# Altium PCB arca.PcbDoc (part 2 of 2)
Units mm, origin at the board's own origin, x right, y up, seen from the top; angles counter-clockwise.
Board outline 304.8 x 85 mm, 2 copper layers (Top Layer, Bottom Layer); 193 components, 131 nets, 585 pads, 90 vias.
Unrouted connection lines stored in the file: 15.
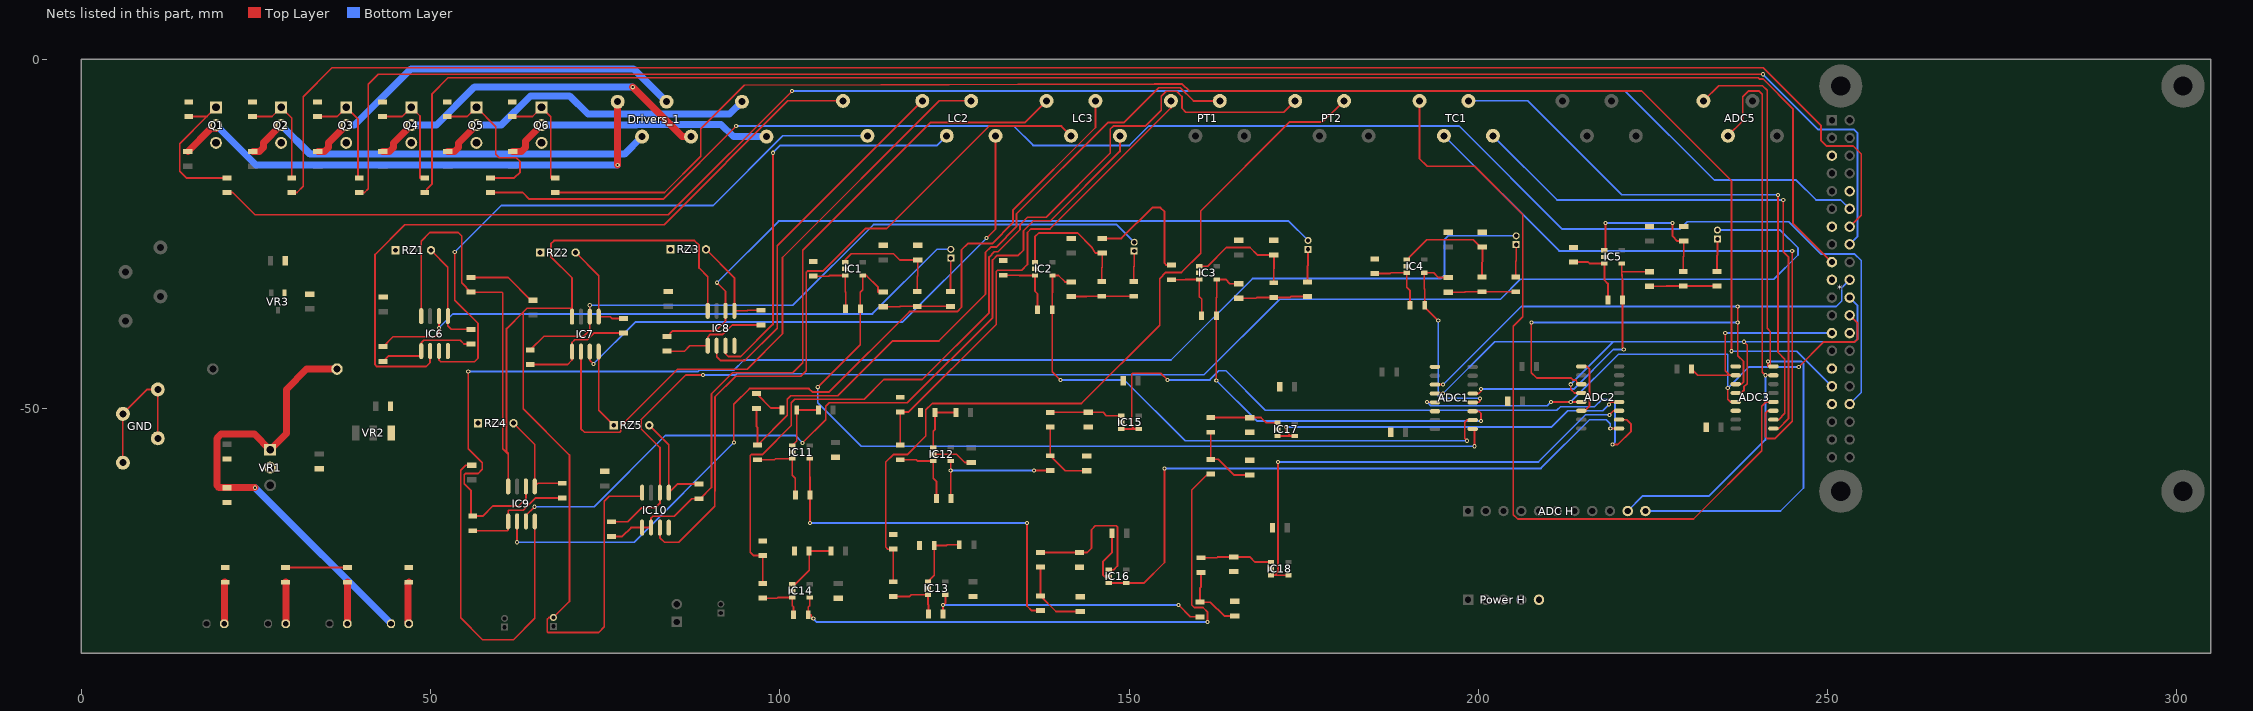
[diagram p2: the nets of this part, all layers, seen from the top]

## Via types
v1: diameter 0.6, hole 0.3, Top Layer to Bottom Layer, 90 vias

## Nets (pads, with @x,y where several pads share a name; then routed paths per layer and width w, separated by ;. In a path a pad name is that pad's centre, name@x,y a point inside that pad or via, vN(x,y) a via of type N, cw(c..) or ccw(c..) an arc to the next point about the centre after c; other vN are vias at no path point) (continued)
ADC3_A6: "ADC H.10" ADC3.7 ADC5.2 | length 84.5
  Top Layer w0.254: ADC5.2@235.712,-10.922 237.82,-8.814 237.82,-5.334 238.633,-4.521 240.182,-4.521 240.614,-4.953 240.614,-44.755 v1(241.071,-45.212) ADC3.7@242.222,-45.212
  Bottom Layer w0.254: 221.361,-64.643 223.52,-62.484 233.045,-62.484 241.071,-54.458 v1(241.071,-45.212)
ADC3_A7: "ADC H.11" ADC3.8 ADC5.1 | length 98.5
  Top Layer w0.254: ADC5.1@232.212,-5.922 234.375,-3.759 240.665,-3.759 241.325,-4.42 241.325,-38.481 241.783,-38.938 ADC3.8@241.783,-43.942 ; v1(241.452,-43.231) 241.452,-43.942 ADC3.8@241.783,-43.942 ; ADC3.8@242.222,-43.942 ADC3.8@241.783,-43.942
  Bottom Layer w0.254: 223.901,-64.643 243.23,-64.643 246.532,-61.341 246.532,-43.51 246.253,-43.231 v1(241.452,-43.231)
ADC3_CS: *.26 ADC3.10 R3.1 | length 28.3
  Top Layer w0.254: R3.1@230.514,-44.323 231.403,-45.212 235.966,-45.212 ; v1(235.331,-39.167) 235.331,-44.577 235.966,-45.212 ; ADC3.10@236.822,-45.212 235.966,-45.212
  Bottom Layer w0.254: v1(235.331,-39.167) *.26@250.596,-39.167
CAL: IC6.8 IC7.8 IC8.8 IC9.8 IC10.8 LC_EN/CAL1.2 RPD1.1 | length 213.4
  Top Layer w0.254: IC6.8@48.641,-36.743 48.641,-26.01 49.886,-24.765 53.924,-24.765 54.432,-25.273 54.432,-31.987 RPD1.1@55.753,-33.308 60.173,-33.308 60.3,-33.435 60.3,-55.753 61.087,-56.54 ; IC9.8@61.087,-61.127 61.087,-56.54 ; IC7.8@70.231,-36.823 70.231,-35.611 ; IC10.8@80.264,-62.016 80.264,-62.535 75.565,-62.535 74.854,-63.246 74.854,-81.229 74.041,-82.042 66.802,-82.042 66.675,-81.915 66.675,-80.137 66.929,-79.883 LC_EN/CAL1.2@67.564,-79.883 69.85,-77.597 69.85,-56.617 63.246,-50.013 63.246,-36.144 ; IC8.8@89.662,-35.981 89.662,-31.09 88.417,-29.845 88.417,-26.594 87.757,-25.933 67.666,-25.933 67.208,-26.391 67.208,-28.245 70.231,-31.267 70.231,-35.611 ; 61.087,-56.54 61.087,-56.363 60.858,-56.134 60.858,-38.532 63.246,-36.144 ; 63.246,-36.144 63.779,-35.611 70.231,-35.611
DRIVER_1: *.11 R4.1 | length 247.9
  Top Layer w0.254: R4.1@20.828,-19.05 21.666,-19.05 24.841,-22.225 84.023,-22.225 v1(101.727,-4.521)
  Bottom Layer w0.254: v1(101.727,-4.521) 221.031,-4.521 233.782,-17.272 245.491,-17.272 248.336,-20.117 251.866,-20.117 *.11@253.136,-21.387
DRIVER_1_NEGATIVE: D1.1 Drivers_1.1 Q1.2 | length 74.8
  Top Layer w1: D1.1@15.24,-13.174 18.508,-9.906 19.258,-9.906 Q1.2@19.258,-9.398 ; v1(76.764,-15.113) Drivers_1.1@76.764,-6.049
  Bottom Layer w1: Q1.2@19.258,-9.398 24.973,-15.113 v1(76.764,-15.113)
DRIVER_2: *.13 R5.1 | length 257.1
  Top Layer w0.254: R5.1@30.099,-19.05 30.861,-19.05 31.75,-18.161 31.75,-5.309 35.865,-1.194 240.792,-1.194 249.022,-9.423 249.022,-11.582 249.809,-12.37 253.619,-12.37 254.787,-13.538 254.787,-22.276 *.13@253.136,-23.927
DRIVER_2_NEGATIVE: D2.1 Drivers_1.2 Q2.2 | length 60.4
  Top Layer w1: D2.1@24.536,-13.174 25.459,-13.174 26.06,-12.573 26.06,-11.917 Q2.2@28.58,-9.398
  Bottom Layer w1: Q2.2@28.58,-9.398 32.745,-13.564 77.749,-13.564 Drivers_1.2@80.264,-11.049
DRIVER_3: *.15 R6.1 | length 250.2
  Top Layer w0.254: R6.1@39.751,-19.05 40.513,-19.05 41.046,-18.517 41.046,-3.531 42.469,-2.108 v1(240.715,-2.108)
  Bottom Layer w0.254: v1(240.715,-2.108) 248.639,-10.033 253.771,-10.033 254.279,-10.541 254.279,-25.324 *.15@253.136,-26.467
DRIVER_3_NEGATIVE: D3.1 Drivers_1.3 Q3.2 | length 57.2
  Top Layer w1: D3.1@33.833,-13.174 34.781,-13.174 35.382,-12.573 35.382,-11.917 Q3.2@37.902,-9.398
  Bottom Layer w1: Q3.2@37.902,-9.398 39.091,-9.398 47.142,-1.346 79.061,-1.346 Drivers_1.3@83.764,-6.049
DRIVER_4: *.18 R10.1 | length 236.6
  Top Layer w0.254: R10.1@49.149,-19.05 49.428,-19.05 49.428,-18.567 50.19,-17.805 50.19,-4.902 52.476,-2.616 240.03,-2.616 240.208,-2.794 240.741,-2.794 245.008,-7.061 245.008,-23.419 *.18@250.596,-29.007
DRIVER_4_NEGATIVE: D4.1 Drivers_1.4 Q4.2 | length 51.3
  Top Layer w1: D4.1@43.129,-13.174 44.078,-13.174 44.679,-12.573 44.679,-11.943 Q4.2@47.223,-9.398 ; v1(78.918,-3.962) 86.004,-11.049 Drivers_1.4@87.264,-11.049
  Bottom Layer w1: Q4.2@47.223,-9.398 50.8,-9.398 56.236,-3.962 v1(78.918,-3.962)
DRIVER_5: *.33 R11.1 | length 233.4
  Top Layer w0.254: R11.1@58.547,-19.05 63.17,-19.05 64.11,-19.99 83.261,-19.99 v1(93.726,-9.525)
  Bottom Layer w0.254: v1(93.726,-9.525) 133.452,-9.525 136.23,-12.303 150.038,-12.303 152.816,-9.525 197.256,-9.525 212.014,-24.282 228.803,-24.282 229.87,-23.216 244.399,-23.216 249.047,-27.864 253.873,-27.864 254.787,-28.778 254.787,-47.676 *.33@253.136,-49.327
DRIVER_5_NEGATIVE: D5.1 Drivers_2.1 Q5.2 | length 47.6
  Top Layer w1: D5.1@52.426,-13.174 53.399,-13.174 54,-12.573 54,-11.943 Q5.2@56.545,-9.398
  Bottom Layer w1: Q5.2@56.545,-9.398 60.096,-9.398 64.262,-5.232 69.901,-5.232 72.492,-7.823 92.786,-7.823 Drivers_2.1@94.56,-6.049
DRIVER_6: *.32 R12.1 | length 223.7
  Top Layer w0.254: R12.1@67.818,-19.05 83.464,-19.05 88.646,-13.868 88.646,-9.931 94.894,-3.683 153.568,-3.525 157.598,-3.525 158.569,-4.496 223.342,-4.496 236.22,-17.374 v1(236.22,-41.758)
  Bottom Layer w0.254: v1(236.22,-41.758) 245.567,-41.758 *.32@250.596,-46.787
DRIVER_6_NEGATIVE: D6.1 Drivers_2.2 Q6.2 | length 39.2
  Top Layer w1: D6.1@61.722,-13.174 62.975,-13.174 63.576,-12.573 63.576,-11.689 Q6.2@65.867,-9.398
  Bottom Layer w1: Q6.2@65.867,-9.398 79.426,-9.398 79.529,-9.295 91.566,-9.295 93.32,-11.049 Drivers_2.2@98.06,-11.049
GND: "Power H.5" *.6 *.9 *.14 *.20 *.25 *.30 *.34 ADC1.9 ADC1.14 ADC2.9 ADC2.14 ADC3.9 ADC3.14 C1.2 C2.2 C3.2 C18.2 C19.2 C20.2 C21.2 C23.2 C25.2 C26.2 C27.2 C29.2 C30.2 C31.2 C32.2 C33.2 C34.2 C35.2 C36.1 C37.1 C38.1 C39.1 C40.1 C41.1 C42.2 C43.2 C44.2 C45.2 C46.2 C47.2 C48.2 C49.2 C50.2 C51.2 C52.2 C53.2 C54.2 C55.2 C56.2 C57.2 GND.1 GND.2 GND.3 GND.4 IC1.2 IC2.2 IC3.2 IC4.2 IC5.2 IC6.4 IC7.4 IC8.4 IC9.4 IC10.4 IC11.2 IC12.2 IC13.2 IC14.2 IC15.2 IC16.2 IC17.2 IC18.2 Q1.3 Q2.3 Q3.3 Q4.3 Q5.3 Q6.3 R7.1 R8.1 R9.1 R13.1 R14.1 R15.1 R24.2 R25.2 R31.2 R33.2 R37.2 R38.2 R39.1 R40.1 R41.2 R44.1 R46.1 R48.2 R49.2 R54.1 R56.1 R58.2 R59.2 RPD1.2 RZ1.1 RZ2.1 RZ3.1 RZ4.1 RZ5.1 VR1.2 VR2.1 VR3.1 | length 146.7
  Top Layer w0.254: GND.1@5.922,-57.729 GND.3@5.922,-50.729 9.422,-47.229 GND.4@10.922,-47.229 GND.2@10.922,-54.229 ; R38.2@29.21,-72.737 R39.1@38.1,-72.737 ; RPD1.2@55.753,-31.208 61.083,-31.208 64.338,-34.463 C31.2@64.643,-34.463 ; C34.2@55.849,-58.077 54.991,-58.077 54.285,-58.783 54.285,-79.939 57.404,-83.058 61.849,-83.058 64.897,-80.01 IC9.4@64.897,-66.127 ; IC7.4@74.041,-41.823 74.041,-50.212 RZ5.1@76.2,-52.371 ; R44.1@96.647,-47.845 98.713,-49.911 100.296,-49.911 R48.2@100.296,-50.165 ; IC12.2@121.94,-56.515 125.273,-56.515 126.45,-57.692 C43.2@127.381,-57.692 ; C21.2@146.143,-25.62 148.878,-25.62 153.289,-21.209 154.457,-21.209 155.058,-21.81 155.058,-29.167 155.321,-29.43 R31.2@156.049,-29.43 ; IC16.2@147.086,-74.007 146.431,-74.007 146.253,-73.829 146.253,-71.831 147.54,-70.544 C47.2@147.54,-67.818 ; ADC2.14@214.724,-50.292 215.24,-50.292 215.875,-49.657 215.875,-44.298 215.519,-43.942 ADC2.9@214.724,-43.942
LC1: ADC1.1 C16.2 IC1.4 R20.1 | length 124.5
  Top Layer w0.254: v1(105.41,-46.914) 111.506,-40.818 R20.1@111.506,-35.687 111.506,-33.299 111.833,-32.972 IC1.4@111.833,-30.922 112.37,-30.922 114.046,-32.598 114.046,-33.29 C16.2@114.774,-33.29 ; ADC1.1@199.169,-52.895 199.415,-52.895 v1(199.415,-55.372)
  Bottom Layer w0.254: v1(105.41,-46.914) 105.41,-49.149 111.633,-55.372 v1(199.415,-55.372)
LC1_OUT_N: IC6.2 LC1.1 | length 101.8
  Top Layer w0.254: IC6.2@49.911,-41.743 49.911,-43.383 49.327,-43.967 42.291,-43.967 42.037,-43.713 42.037,-27.915 46.304,-23.647 83.414,-23.647 101.139,-5.922 LC1.1@109.022,-5.922
LC1_OUT_P: IC6.3 LC1.2 | length 89.8
  Top Layer w0.254: IC6.3@51.181,-41.743 51.181,-43.028 51.435,-43.282 56.261,-43.282 56.769,-42.774 56.769,-37.77 53.442,-34.442 v1(53.442,-27.559)
  Bottom Layer w0.254: v1(53.442,-27.559) 60.096,-20.904 90.424,-20.904 100.406,-10.922 LC1.2@112.522,-10.922
LC1_PREC: IC6.6 LCIN1.2 RF1.1 | length 89.2
  Top Layer w0.254: RF1.1@43.18,-41.114 44.594,-39.7 50.673,-39.7 51.181,-39.192 v1(51.181,-38.43) IC6.6@51.181,-36.743
  Bottom Layer w0.254: v1(51.181,-38.43) 53.188,-36.424 113.233,-36.424 122.479,-27.178 LCIN1.2@124.46,-27.178
LC2: ADC1.2 C17.2 IC2.4 R23.1 | length 84.4
  Top Layer w0.254: v1(140.157,-45.898) 138.972,-44.713 R23.1@138.972,-35.814 138.972,-33.401 139.011,-33.362 IC2.4@139.011,-30.922 139.878,-30.922 140.799,-31.843 C17.2@141.698,-31.843 ; v1(198.374,-54.585) 198.018,-54.229 198.018,-51.943 198.336,-51.625 ADC1.2@199.169,-51.625
  Bottom Layer w0.254: v1(140.157,-45.898) 149.327,-45.898 158.013,-54.585 v1(198.374,-54.585)
LC2_OUT_N: IC7.2 LC2.3 | length 93.6
  Top Layer w0.254: IC7.2@71.501,-41.823 71.501,-52.857 72.009,-53.365 77.038,-53.365 77.191,-53.213 77.191,-52.468 85.323,-44.336 95.288,-44.336 100.355,-39.268 100.355,-28.346 122.78,-5.922 LC2.3@127.373,-5.922
LC2_OUT_P: IC7.3 LC2.4 | length 80.9
  Top Layer w0.254: IC7.3@72.771,-41.823 72.771,-43.053 v1(73.304,-43.586) ; v1(129.565,-25.578) 130.873,-24.27 LC2.4@130.873,-10.922
  Bottom Layer w0.254: v1(73.304,-43.586) 79.324,-37.567 117.577,-37.567 v1(129.565,-25.578)
LC2_PREC: IC7.6 LCIN2.2 RF2.1 | length 97
  Top Layer w0.254: RF2.1@64.262,-41.575 66.221,-39.616 71.882,-39.616 72.771,-38.727 IC7.6@72.771,-36.823 v1(72.771,-35.179)
  Bottom Layer w0.254: v1(72.771,-35.179) 101.854,-35.179 113.39,-23.643 148.196,-23.643 LCIN2.2@150.715,-26.162
LC3: ADC1.3 C22.2 IC3.4 R28.1 | length 60.6
  Top Layer w0.254: v1(162.467,-45.957) R28.1@162.467,-36.703 162.467,-34.138 162.526,-34.079 IC3.4@162.526,-31.491 163.805,-31.491 164.411,-32.097 C22.2@165.701,-32.097 ; ADC1.3@199.169,-50.355 200.038,-50.355 200.355,-50.673 v1(200.355,-51.74)
  Bottom Layer w0.254: v1(162.467,-45.957) 168.25,-51.74 v1(200.355,-51.74)
LC3_OUT_N: IC8.2 LC2.1 | length 53.5
  Top Layer w0.254: IC8.2@90.932,-40.981 90.932,-42.545 91.465,-43.078 94.989,-43.078 99.609,-38.458 99.609,-26.686 LC2.1@120.373,-5.922
LC3_OUT_P: IC8.3 LC2.2 | length 60.5
  Top Layer w0.254: IC8.3@92.202,-40.981 92.202,-42.139 92.583,-42.52 94.389,-42.52 98.984,-37.925 v1(98.984,-13.36)
  Bottom Layer w0.254: v1(98.984,-13.36) 100.041,-12.303 122.492,-12.303 LC2.2@123.873,-10.922
LC3_PREC: IC8.6 LCIN3.2 RF3.1 | length 104.7
  Top Layer w0.254: RF3.1@83.82,-39.656 84.622,-38.854 90.805,-38.854 92.202,-37.457 IC8.6@92.202,-35.981 92.202,-33.172 v1(90.983,-31.953)
  Bottom Layer w0.254: v1(90.983,-31.953) 99.801,-23.135 172.834,-23.135 LCIN3.2@175.607,-25.908
LC4: ADC1.4 C24.2 IC4.4 R32.1 | length 29.8
  Top Layer w0.254: v1(194.234,-37.38) 192.312,-35.458 R32.1@192.312,-35.179 192.312,-32.918 192.224,-32.83 IC4.4@192.224,-30.541 193.599,-30.541 194.266,-31.208 C24.2@195.673,-31.208 ; ADC1.4@199.169,-49.085 200.038,-49.085 200.228,-48.895 v1(200.228,-48.514)
  Bottom Layer w0.254: v1(194.234,-37.38) 194.234,-48.133 194.615,-48.514 v1(200.228,-48.514)
LC4_OUT_N: IC9.2 LC3.3 | length 123.7
  Top Layer w0.254: v1(62.357,-69.113) IC9.2@62.357,-66.127 ; v1(93.396,-54.839) 93.396,-49.349 95.631,-47.114 104.145,-47.114 104.628,-47.597 107.039,-47.597 118.542,-36.093 125.356,-36.093 125.989,-35.46 125.989,-27.24 126.873,-26.356 130.365,-26.356 133.342,-23.378 133.342,-21.565 145.169,-9.738 LC3.3@145.169,-5.922
  Bottom Layer w0.254: v1(62.357,-69.113) 79.121,-69.113 v1(93.396,-54.839)
LC4_OUT_P: IC9.3 LC3.4 | length 118.2
  Top Layer w0.254: IC9.3@63.627,-66.127 63.627,-65.278 v1(64.872,-64.033) ; v1(103.226,-54.889) 106.553,-51.562 106.553,-49.657 107.061,-49.149 118.237,-49.149 130.439,-36.947 130.439,-28.702 131.095,-28.046 134.125,-28.046 134.866,-27.305 134.866,-24.511 136.289,-23.089 138.735,-23.089 148.669,-13.154 LC3.4@148.669,-10.922
  Bottom Layer w0.254: v1(64.872,-64.033) 73.406,-64.033 83.617,-53.823 102.159,-53.823 v1(103.226,-54.889)
LC4_PREC: IC9.6 LCIN4.2 RF4.1 | length 195.8
  Top Layer w0.254: v1(55.372,-44.679) 55.372,-55.753 57.379,-57.76 57.379,-58.674 56.769,-59.284 54.966,-59.284 54.793,-59.457 54.793,-60.736 55.753,-61.697 55.753,-65.371 RF4.1@56.007,-65.371 57.455,-65.371 58.894,-63.932 62.611,-63.932 63.627,-62.916 IC9.6@63.627,-61.127
  Bottom Layer w0.254: v1(55.372,-44.679) 88.231,-44.679 88.43,-44.48 93.391,-44.48 94.844,-43.028 155.981,-43.028 167.64,-31.369 194.615,-31.369 195.123,-30.861 195.123,-25.781 195.656,-25.248 LCIN4.2@205.4,-25.248
LC5: ADC1.5 C28.2 IC5.4 R36.1 | length 40.8
  Top Layer w0.254: ADC1.5@199.169,-47.816 200.025,-47.816 200.355,-47.485 v1(200.355,-47.188) ; IC5.4@220.525,-29.205 220.525,-30.38 ; v1(220.802,-41.504) 220.633,-41.334 R36.1@220.633,-34.417 220.633,-31.769 220.525,-30.38 ; C28.2@224.482,-30.38 220.525,-30.38
  Bottom Layer w0.254: v1(200.355,-47.188) 213.644,-47.188 219.329,-41.504 v1(220.802,-41.504)
LC5_OUT_N: IC10.1 IC10.2 LC3.1 RF5.2 RG5.2 | length 106.2
  Top Layer w0.254: RF5.2@75.877,-68.28 77.419,-68.28 78.683,-67.016 IC10.1@80.264,-67.016 IC10.2@81.534,-67.016 81.534,-65.659 81.788,-65.405 84.861,-65.405 87.381,-62.885 RG5.2@88.392,-62.885 88.573,-62.885 90.195,-61.263 90.195,-47.844 93.196,-44.844 101.83,-44.844 103.261,-43.413 103.261,-27.295 121.523,-9.033 135.058,-9.033 LC3.1@138.169,-5.922
LC5_OUT_P: IC10.3 LC3.2 | length 103.2
  Top Layer w0.254: IC10.3@82.804,-67.016 82.804,-68.453 83.464,-69.113 85.522,-69.113 90.651,-63.984 90.651,-61.825 90.703,-61.773 90.703,-48.311 93.662,-45.352 102.997,-45.352 103.769,-44.58 103.769,-30.48 103.958,-30.291 106.147,-30.291 112.231,-24.206 115.256,-24.206 129.921,-9.541 140.288,-9.541 LC3.2@141.669,-10.922
LC5_PREC: IC10.6 LCIN5.2 RF5.1 | length 210.3
  Top Layer w0.254: RF5.1@75.877,-66.18 78.219,-66.18 80.213,-64.186 82.169,-64.186 82.804,-63.551 IC10.6@82.804,-62.016 82.804,-55.55 80.086,-52.832 80.086,-51.613 86.534,-45.165 v1(88.976,-45.165)
  Bottom Layer w0.254: v1(88.976,-45.165) 93.646,-45.165 93.832,-44.979 107.187,-44.979 107.345,-45.136 160.706,-45.136 171.526,-34.315 203.149,-34.315 205.994,-31.471 242.265,-31.471 245.745,-27.991 245.745,-26.975 243.19,-24.42 LCIN5.2@234.209,-24.42
MISO: *.21 ADC1.12 ADC2.12 ADC3.12 | length 89.9
  Top Layer w0.254: ADC1.12@193.769,-47.816 v1(194.92,-47.816) ; v1(213.208,-46.507) 213.208,-47.219 213.741,-47.752 ADC2.12@214.724,-47.752 ; ADC3.12@236.822,-47.752 237.617,-47.752 237.998,-47.371 237.998,-46.864 238.461,-46.401 238.461,-40.874 v1(237.998,-40.411)
  Bottom Layer w0.254: v1(194.92,-47.816) 202.324,-40.411 219.304,-40.411 ; v1(213.208,-46.507) 219.304,-40.411 ; *.21@253.136,-34.087 254.279,-35.23 254.279,-40.005 253.873,-40.411 v1(237.998,-40.411) 219.304,-40.411
MOSI: *.19 ADC1.11 ADC2.11 ADC3.11 | length 123.8
  Top Layer w0.254: ADC1.11@193.769,-46.545 v1(194.92,-46.545) ; v1(207.569,-37.668) 207.569,-44.831 208.331,-45.593 213.284,-45.593 213.589,-45.898 213.995,-45.898 214.122,-46.482 ADC2.11@214.724,-46.482 ; ADC3.11@236.822,-46.482 237.597,-46.482 237.953,-46.126 237.953,-43.237 237.109,-42.393 v1(237.109,-37.668) v1(237.109,-35.357)
  Bottom Layer w0.254: v1(194.92,-46.545) 206.108,-35.357 v1(237.109,-35.357) 251.206,-35.357 251.993,-34.569 251.993,-32.69 *.19@253.136,-31.547 ; v1(207.569,-37.668) v1(237.109,-37.668)
Net3V3_K: 3V3.K R41.1 | length 6.1
  Top Layer w1: 3V3.K@20.447,-80.772 20.447,-74.837 R41.1@20.574,-74.837
Net5V_K: 5V.K R38.1 | length 6
  Top Layer w1: R38.1@29.21,-74.837 29.252,-74.837 5V.K@29.252,-80.772
Net10V_K: 10V.K R39.2 | length 6
  Top Layer w1: 10V.K@38.058,-80.772 38.058,-74.837 R39.2@38.1,-74.837
Net12V_A: 12V.A C36.2 D8.2 VR1.1 | length 66.8
  Top Layer w1: v1(24.858,-61.307) C36.2@20.828,-61.307 19.685,-61.307 19.38,-61.002 19.38,-54.229 19.99,-53.619 24.744,-53.619 VR1.1@27.005,-55.88 29.337,-53.548 29.337,-47.219 32.233,-44.323 D8.2@36.576,-44.323
  Bottom Layer w1: v1(24.858,-61.307) 12V.A@44.323,-80.772
Net12V_K: 12V.K R40.2 | length 6
  Top Layer w1: 12V.K@46.863,-80.772 46.775,-80.684 46.775,-80.506 46.761,-80.492 46.761,-74.939 R40.2@46.863,-74.837
NetC16_1: C16.1 R18.1 R19.2 | length 9.7
  Top Layer w0.254: C16.1@114.774,-35.39 117.17,-35.39 117.22,-35.34 R19.2@119.665,-35.34 R18.1@124.426,-35.34
NetC17_1: C17.1 R21.1 R22.2 | length 9
  Top Layer w0.254: C17.1@141.698,-33.943 143.84,-33.943 143.89,-33.893 R22.2@146.081,-33.893 R21.1@150.64,-33.893
NetC20_1: C20.1 IC1.1 R19.1 | length 16
  Top Layer w0.254: IC1.1@109.333,-29.022 109.333,-28.691 110.211,-27.813 116.25,-27.813 117.139,-28.702 C20.1@119.727,-28.702 119.727,-30.951 119.665,-31.013 R19.1@119.665,-33.24
NetC21_1: C21.1 IC2.1 R22.1 | length 18.9
  Top Layer w0.254: IC2.1@136.511,-29.022 136.5,-29.022 136.5,-25.375 137.033,-24.841 142.621,-24.841 144.653,-26.873 145.161,-27.72 C21.1@146.143,-27.72 146.143,-29.732 146.081,-29.794 R22.1@146.081,-31.793
NetC22_1: C22.1 R26.1 R27.2 | length 9.9
  Top Layer w0.254: C22.1@165.701,-34.197 168.123,-34.197 168.25,-34.07 R27.2@170.688,-34.07 173.025,-34.07 173.152,-33.943 R26.1@175.514,-33.943
NetC24_1: C24.1 R29.1 R30.2 | length 9.7
  Top Layer w0.254: C24.1@195.673,-33.308 198.044,-33.308 198.094,-33.258 R30.2@200.499,-33.258 R29.1@205.325,-33.258
NetC25_1: C25.1 IC3.1 R27.1 | length 16.2
  Top Layer w0.254: IC3.1@160.026,-29.591 161.214,-29.591 163.881,-26.924 167.284,-26.924 168.334,-27.974 C25.1@170.716,-27.974 170.716,-29.969 170.688,-29.997 R27.1@170.688,-31.97
NetC27_1: C27.1 IC4.1 R30.1 | length 17
  Top Layer w0.254: IC4.1@189.724,-28.641 190.102,-28.641 190.102,-28.321 192.616,-25.806 199.229,-25.806 200.254,-26.831 C27.1@200.561,-26.831 200.561,-28.97 200.499,-29.032 R30.1@200.499,-31.158
NetC28_1: C28.1 R34.1 R35.2 | length 9.7
  Top Layer w0.254: C28.1@224.482,-32.48 226.847,-32.48 226.897,-32.43 R35.2@229.308,-32.43 R34.1@234.134,-32.43
NetC30_1: C30.1 IC5.1 R35.1 | length 21.8
  Top Layer w0.254: IC5.1@218.025,-27.305 218.186,-27.305 v1(218.186,-23.393) ; v1(227.787,-23.393) 227.787,-25.317 228.473,-26.003 C30.1@229.37,-26.003 229.37,-28.157 229.308,-28.219 R35.1@229.308,-30.33
  Bottom Layer w0.254: v1(218.186,-23.393) v1(227.787,-23.393)
NetC48_1: C48.1 R62.1 R63.2 | length 10.2
  Top Layer w0.254: R63.2@138.684,-52.612 R62.1@138.684,-56.735 140.818,-58.869 C48.1@143.891,-58.869
NetC49_1: C49.1 IC15.1 R63.1 | length 10.4
  Top Layer w0.254: R63.1@138.684,-50.512 C49.1@144.145,-50.512 146.253,-50.512 146.734,-50.993 IC15.1@148.864,-50.993
NetC50_1: C50.1 R64.1 R65.2 | length 10.8
  Top Layer w0.254: R65.2@137.287,-72.678 R64.1@137.287,-76.801 139.514,-79.028 C50.1@143.002,-79.028
NetC51_1: C51.1 IC16.1 R65.1 | length 21.3
  Top Layer w0.254: R65.1@137.287,-70.578 C51.1@142.875,-70.578 144.001,-70.578 144.602,-69.977 144.602,-67.31 145.161,-66.751 148.133,-66.751 148.311,-66.929 148.311,-72.517 147.771,-73.057 IC16.1@147.086,-73.057
NetC54_1: C54.1 R66.1 R67.2 | length 10.4
  Top Layer w0.254: R67.2@161.671,-53.374 R66.1@161.671,-57.243 162.756,-57.243 164.983,-59.47 C54.1@167.259,-59.47
NetC55_1: C55.1 IC17.1 R67.1 | length 9.8
  Top Layer w0.254: R67.1@161.671,-51.274 C55.1@167.259,-51.274 168.859,-51.274 169.594,-52.009 IC17.1@171.216,-52.009
NetC56_1: C56.1 R68.1 R69.2 | length 10.1
  Top Layer w0.254: R69.2@160.274,-73.44 160.274,-75.514 160.147,-75.641 R68.1@160.147,-77.69 161.62,-77.69 163.593,-79.663 C56.1@165.1,-79.663
NetC57_1: C57.1 IC18.1 R69.1 | length 10.4
  Top Layer w0.254: R69.1@160.274,-71.34 162.56,-71.34 162.687,-71.213 C57.1@164.973,-71.213 167.259,-71.213 167.994,-71.948 IC18.1@170.307,-71.948
NetIC1_3: IC1.3 R20.2 R24.1 | length 9.4
  Top Layer w0.254: R24.1@104.775,-31.022 106.985,-31.022 107.085,-30.922 IC1.3@109.333,-30.922 109.333,-33.277 109.406,-33.35 R20.2@109.406,-35.687
NetIC2_3: IC2.3 R23.2 R25.1 | length 9.6
  Top Layer w0.254: R25.1@131.953,-30.895 134.214,-30.895 134.241,-30.922 IC2.3@136.511,-30.922 136.511,-33.192 136.872,-33.553 R23.2@136.872,-35.814
NetIC3_3: IC3.3 R28.2 R31.1 | length 9.3
  Top Layer w0.254: R31.1@156.049,-31.53 158.013,-31.53 158.052,-31.491 IC3.3@160.026,-31.491 160.026,-33.949 160.367,-34.29 R28.2@160.367,-36.703
NetIC4_3: IC4.3 R32.2 R33.1 | length 9.5
  Top Layer w0.254: R33.1@185.132,-30.641 187.376,-30.641 187.476,-30.541 IC4.3@189.724,-30.541 189.724,-32.634 190.212,-33.122 R32.2@190.212,-35.179
NetIC5_3: IC5.3 R36.2 R37.1 | length 9.9
  Top Layer w0.254: R37.1@213.614,-28.99 215.697,-28.99 215.912,-29.205 IC5.3@218.025,-29.205 218.025,-31.572 218.533,-32.08 R36.2@218.533,-34.417
NetIC6_1: IC6.1 RF1.2 RG1.2 | length 15.1
  Top Layer w0.254: RF1.2@43.18,-43.214 43.925,-42.469 48.641,-42.469 IC6.1@48.641,-41.743 48.641,-40.581 49.014,-40.208 54.239,-40.208 54.766,-40.735 RG1.2@55.753,-40.735
NetIC6_5: IC6.5 RG1.1 RZ1.3 | length 15.3
  Top Layer w0.254: RZ1.3@50.038,-27.305 52.451,-29.718 IC6.5@52.451,-36.743 52.451,-38.125 52.961,-38.635 RG1.1@55.753,-38.635
NetIC7_1: IC7.1 RF2.2 RG2.2 | length 16.7
  Top Layer w0.254: RF2.2@64.262,-43.675 69.584,-43.675 70.231,-43.028 IC7.1@70.231,-41.823 70.231,-40.513 70.62,-40.124 72.382,-40.124 73.337,-39.169 RG2.2@77.597,-39.169
NetIC7_5: IC7.5 RG2.1 RZ2.3 | length 14.2
  Top Layer w0.254: RZ2.3@70.739,-27.639 74.041,-30.941 IC7.5@74.041,-36.823 75.692,-36.823 75.938,-37.069 RG2.1@77.597,-37.069
NetIC8_1: IC8.1 RF3.2 RG3.2 | length 15.7
  Top Layer w0.254: RF3.2@83.82,-41.756 86.335,-41.756 87.11,-40.981 IC8.1@89.662,-40.981 89.662,-39.743 90.043,-39.362 91.813,-39.362 93.168,-38.007 RG3.2@97.282,-38.007
NetIC8_5: IC8.5 RG3.1 RZ3.3 | length 14.3
  Top Layer w0.254: RZ3.3@89.408,-27.178 93.472,-31.242 IC8.5@93.472,-35.981 95.326,-35.981 95.4,-35.907 RG3.1@97.282,-35.907
NetIC9_1: IC9.1 RF4.2 RG4.2 | length 16.4
  Top Layer w0.254: RF4.2@56.007,-67.471 60.96,-67.471 61.087,-67.344 IC9.1@61.087,-66.127 61.087,-64.592 61.138,-64.541 63.246,-64.541 65.015,-62.772 RG4.2@68.834,-62.772
NetIC9_5: IC9.5 RG4.1 RZ4.3 | length 14.4
  Top Layer w0.254: RZ4.3@61.849,-52.07 64.897,-55.118 IC9.5@64.897,-61.127 65.352,-60.672 RG4.1@68.834,-60.672
NetIC10_5: IC10.5 RG5.1 RZ5.3 | length 15.6
  Top Layer w0.254: RZ5.3@81.28,-52.371 84.074,-55.165 IC10.5@84.074,-62.016 85.305,-60.785 RG5.1@88.392,-60.785
NetIC11_1: IC11.1 R42.2 R48.1 | length 8.4
  Top Layer w0.254: IC11.1@101.767,-55.245 102.396,-54.616 R48.1@102.396,-50.165 R42.2@105.503,-50.165
NetIC11_3: IC11.3 R45.1 R50.2 | length 10.5
  Top Layer w0.254: R45.1@96.774,-57.311 99.187,-57.311 99.353,-57.145 IC11.3@101.767,-57.145 101.767,-59.535 102.201,-59.969 R50.2@102.201,-62.357
NetIC12_1: IC12.1 R43.2 R49.1 | length 8.1
  Top Layer w0.254: IC12.1@121.94,-55.565 121.94,-53.213 122.208,-52.945 R49.1@122.208,-50.546 R43.2@125.188,-50.546
NetIC12_3: IC12.3 R47.1 R51.2 | length 10.4
  Top Layer w0.254: R47.1@117.221,-57.311 119.482,-57.311 119.636,-57.465 IC12.3@121.94,-57.465 121.94,-59.947 122.394,-60.401 R51.2@122.394,-62.865
NetIC13_1: IC13.1 R52.2 R58.1 | length 9.2
  Top Layer w0.254: IC13.1@121.178,-74.742 122.081,-73.839 R58.1@122.081,-69.596 123.8,-69.596 123.927,-69.469 R52.2@125.662,-69.469
NetIC13_3: IC13.3 R55.1 R60.2 | length 7.8
  Top Layer w0.254: R55.1@116.205,-76.869 118.567,-76.869 118.794,-76.642 IC13.3@121.178,-76.642 121.178,-77.981 121.251,-78.054 R60.2@121.251,-79.375
NetIC14_1: IC14.1 R53.2 R59.1 | length 9.1
  Top Layer w0.254: IC14.1@101.747,-75.123 102.178,-75.123 104.174,-73.127 R59.1@104.174,-70.358 R53.2@107.281,-70.358
NetIC14_3: IC14.3 R57.1 R61.2 | length 6.8
  Top Layer w0.254: R57.1@97.536,-77.123 99.568,-77.123 99.668,-77.023 IC14.3@101.747,-77.023 101.747,-78.184 101.947,-78.384 R61.2@101.947,-79.502
NetLCIN1_1: LCIN1.1 R18.2 | length 4.8
  Top Layer w0.254: R18.2@124.426,-33.24 124.426,-30.861 124.46,-30.827 LCIN1.1@124.46,-28.448
NetLCIN2_1: LCIN2.1 R21.2 | length 4.4
  Top Layer w0.254: R21.2@150.64,-31.793 150.64,-29.667 150.715,-29.592 LCIN2.1@150.715,-27.432
NetLCIN3_1: LCIN3.1 R26.2 | length 4.7
  Top Layer w0.254: R26.2@175.514,-31.843 175.514,-29.566 175.607,-29.473 LCIN3.1@175.607,-27.178
NetLCIN4_1: LCIN4.1 R29.2 | length 4.7
  Top Layer w0.254: R29.2@205.325,-31.158 205.325,-28.88 205.4,-28.805 LCIN4.1@205.4,-26.518
NetLCIN5_1: LCIN5.1 R34.2 | length 4.7
  Top Layer w0.254: R34.2@234.134,-30.33 234.134,-28.067 234.209,-27.992 LCIN5.1@234.209,-25.69
NetQ1_1: Q1.1 R4.2 R7.2 | length 21.1
  Top Layer w0.254: R7.2@15.367,-8.162 17.954,-8.162 ; Q1.1@19.258,-6.858 17.954,-8.162 ; R4.2@20.828,-16.95 14.994,-16.95 14.059,-16.015 14.059,-12.057 17.954,-8.162
NetQ2_1: Q2.1 R5.2 R8.2 | length 15.4
  Top Layer w0.254: R8.2@24.486,-8.162 27.276,-8.162 Q2.1@28.58,-6.858 30.099,-8.377 R5.2@30.099,-16.95
NetQ3_1: Q3.1 R6.2 R9.2 | length 15.6
  Top Layer w0.254: R9.2@33.783,-8.162 36.598,-8.162 Q3.1@37.902,-6.858 39.599,-8.555 39.599,-16.95 R6.2@39.751,-16.95
NetQ4_1: Q4.1 R10.2 R13.2 | length 16
  Top Layer w0.254: R13.2@43.079,-8.162 45.919,-8.162 Q4.1@47.223,-6.858 48.463,-8.098 48.463,-16.95 R10.2@49.149,-16.95
NetQ5_1: Q5.1 R11.2 R14.2 | length 22.6
  Top Layer w0.254: R14.2@52.376,-8.162 55.241,-8.162 Q5.1@56.545,-6.858 59.301,-9.614 59.301,-13.539 59.817,-14.055 62.239,-14.055 62.789,-14.605 62.789,-16.129 61.968,-16.95 R11.2@58.547,-16.95
NetQ6_1: Q6.1 R12.2 R15.2 | length 16
  Top Layer w0.254: R15.2@61.672,-8.162 64.563,-8.162 Q6.1@65.867,-6.858 67.183,-8.174 67.183,-16.95 R12.2@67.818,-16.95
PT1: ADC2.1 IC16.3 IC16.4 | length 91.5
  Top Layer w0.254: IC16.3@147.086,-74.957 IC16.4@149.586,-74.957 152.094,-74.957 155.042,-72.009 v1(155.042,-58.547) ; v1(218.872,-52.832) ADC2.1@220.124,-52.832
  Bottom Layer w0.254: v1(155.042,-58.547) 208.94,-58.547 215.9,-51.587 218.313,-51.587 218.872,-52.146 v1(218.872,-52.832)
PT1_OUT: PT1.3 R44.2 R45.2 | length 99.5
  Top Layer w0.254: R44.2@96.647,-49.945 96.647,-52.527 96.774,-52.654 R45.2@96.774,-55.211 101.041,-50.944 101.041,-48.641 101.549,-48.133 108.28,-48.133 116.129,-40.284 122.758,-40.284 129.423,-33.62 129.423,-27.616 130.175,-26.864 130.934,-26.864 133.85,-23.947 133.85,-22.122 146.939,-9.033 149.234,-9.033 154.234,-4.033 157.299,-4.033 159.21,-5.944 162.965,-5.944 PT1.3@162.965,-5.922
PT1_PREC: IC11.4 R50.1 R64.2 | length 54.4
  Top Layer w0.254: IC11.4@104.267,-57.145 104.267,-59.758 104.301,-59.792 R50.1@104.301,-62.357 v1(104.301,-66.37) ; v1(135.357,-66.37) 135.357,-78.241 136.017,-78.901 R64.2@137.287,-78.901
  Bottom Layer w0.254: v1(104.301,-66.37) v1(135.357,-66.37)
PT2: ADC2.2 IC15.3 IC15.4 | length 96.4
  Top Layer w0.254: IC15.3@148.864,-52.893 150.749,-52.893 ; IC15.4@151.364,-52.893 150.749,-52.893 ; v1(155.473,-45.872) 154.508,-44.907 150.495,-44.907 150.368,-45.034 150.368,-52.512 150.749,-52.893 ; v1(219.202,-55.118) 219.939,-55.118 221.844,-53.213 221.844,-52.197 221.209,-51.562 ADC2.2@220.124,-51.562
  Bottom Layer w0.254: v1(155.473,-45.872) 161.544,-45.872 162.839,-44.577 163.855,-44.577 169.494,-50.216 211.226,-50.216 211.734,-49.708 216.611,-49.708 217.627,-48.692 219.075,-48.692 219.553,-49.17 219.553,-54.767 v1(219.202,-55.118)
PT2_OUT: PT1.1 R46.2 R47.2 | length 69.7
  Top Layer w0.254: R47.2@117.221,-55.211 R46.2@117.221,-50.453 118.432,-50.453 130.947,-37.938 130.947,-30.353 131.136,-30.164 134.606,-30.164 135.433,-29.337 135.433,-24.765 135.941,-24.257 138.659,-24.257 155.965,-6.951 PT1.1@155.965,-5.922
PT2_PREC: IC12.4 R51.1 R62.2 | length 19.6
  Top Layer w0.254: IC12.4@124.44,-57.465 v1(124.44,-58.835) 124.44,-61.677 R51.1@124.494,-62.865 ; v1(136.363,-58.835) R62.2@138.684,-58.835
  Bottom Layer w0.254: v1(124.44,-58.835) v1(136.363,-58.835)
PT3: ADC2.3 IC18.3 IC18.4 | length 70.8
  Top Layer w0.254: IC18.3@170.307,-73.848 170.83,-73.848 ; v1(171.298,-57.607) 171.298,-73.381 170.83,-73.848 ; IC18.4@172.807,-73.848 170.83,-73.848 ; v1(218.745,-50.876) 219.329,-50.292 ADC2.3@220.124,-50.292
  Bottom Layer w0.254: v1(171.298,-57.607) 208.585,-57.607 215.316,-50.876 v1(218.745,-50.876)
PT3_OUT: PT2.3 R54.2 R55.2 | length 114.7
  Top Layer w0.254: R55.2@116.205,-74.769 R54.2@116.205,-70.104 115.443,-70.104 115.138,-69.799 115.138,-57.633 116.205,-56.566 118.212,-56.566 120.879,-53.899 120.879,-50.165 121.793,-49.251 143.154,-49.251 154.356,-38.049 154.356,-31.369 155.245,-30.48 157.48,-30.48 160.223,-27.737 160.223,-21.692 172.974,-8.941 177.742,-8.941 PT2.3@180.761,-5.922
PT3_PREC: IC13.4 R60.1 R68.2 | length 40.5
  Top Layer w0.254: R60.1@123.351,-79.375 v1@123.351,-78.181 ; v1(123.351,-78.08) v1@123.351,-78.181 ; IC13.4@123.678,-76.642 123.678,-77.854 v1@123.351,-78.181 ; v1(157.048,-78.08) 158.759,-79.79 R68.2@160.147,-79.79
  Bottom Layer w0.254: v1(123.351,-78.08) v1(157.048,-78.08)
PT4: ADC2.4 IC17.3 IC17.4 | length 53.2
  Top Layer w0.254: IC17.3@171.216,-53.909 173.101,-53.909 ; v1(172.466,-52.629) 172.466,-53.274 173.101,-53.909 ; IC17.4@173.716,-53.909 173.101,-53.909 ; v1(218.694,-49.378) 219.05,-49.022 ADC2.4@220.124,-49.022
  Bottom Layer w0.254: v1(172.466,-52.629) 210.439,-52.629 212.776,-50.292 217.78,-50.292 v1(218.694,-49.378)
PT4_OUT: PT2.1 R56.2 R57.2 | length 132.5
  Top Layer w0.254: R57.2@97.536,-75.023 R56.2@97.536,-71.027 96.249,-71.027 95.758,-70.536 95.758,-56.693 95.885,-56.566 97.46,-56.566 101.625,-52.4 101.625,-49.149 102.133,-48.641 112.039,-48.641 114.859,-45.822 120.345,-45.822 129.931,-36.236 129.931,-28.286 130.683,-27.534 131.216,-27.534 134.358,-24.392 134.358,-23.655 135.433,-22.581 138.1,-22.581 147.288,-13.392 147.288,-9.954 147.701,-9.541 152.307,-9.541 154.584,-7.264 154.584,-5.278 155.321,-4.541 156.785,-4.541 157.553,-5.309 157.553,-6.985 158.112,-7.544 172.139,-7.544 PT2.1@173.761,-5.922
PT4_PREC: IC14.4 R61.1 R66.2 | length 84.6
  Top Layer w0.254: IC14.4@104.247,-77.023 104.247,-78.184 104.047,-78.384 R61.1@104.047,-79.502 104.47,-79.502 104.47,-79.731 v1(104.775,-80.035) ; v1(161.214,-80.543) 161.214,-79.121 160.553,-78.461 159.309,-78.461 158.953,-78.105 158.953,-61.629 161.239,-59.343 R66.2@161.671,-59.343
  Bottom Layer w0.254: v1(104.775,-80.035) 104.927,-80.035 104.927,-80.188 105.283,-80.543 v1(161.214,-80.543)
SCK: *.23 ADC1.13 ADC2.13 ADC3.13 | length 82.1
  Top Layer w0.254: v1(192.634,-49.022) 192.697,-49.085 ADC1.13@193.769,-49.085 ; v1(210.388,-49.022) v1(213.208,-49.022) ADC2.13@214.724,-49.022 ; v1(235.687,-47.041) 235.687,-48.641 236.068,-49.022 ADC3.13@236.822,-49.022 ; v1(245.847,-44.018) 249.428,-40.437 253.873,-40.437 254.279,-40.03 254.279,-37.77 *.23@253.136,-36.627
  Bottom Layer w0.254: v1(192.634,-49.022) 193.178,-49.566 209.844,-49.566 v1(210.388,-49.022) ; v1(213.208,-49.022) 220.04,-42.189 235.687,-42.189 v1(235.687,-47.041) 238.709,-44.018 v1(245.847,-44.018)
TC1: ADC3.1 TC1.4 | length 79.7
  Top Layer w0.254: ADC3.1@242.222,-52.832 242.976,-52.832 244.369,-51.439 244.369,-28.231 243.637,-27.499 v1(243.637,-20.117)
  Bottom Layer w0.254: TC1.4@202.057,-10.922 211.252,-20.117 v1(243.637,-20.117)
TC2: ADC3.2 TC1.3 | length 83.6
  Top Layer w0.254: ADC3.2@242.222,-51.562 242.972,-51.562 243.861,-50.673 243.861,-42.896 242.875,-41.91 v1(242.875,-19.38)
  Bottom Layer w0.254: TC1.3@198.557,-5.922 207.065,-5.922 220.523,-19.38 v1(242.875,-19.38)
TC3: ADC3.3 TC1.2 | length 90.7
  Top Layer w0.254: ADC3.3@242.222,-50.292 241.427,-50.292 241.071,-50.648 241.071,-53.975 241.376,-54.28 242.418,-54.28 244.907,-51.791 v1(244.907,-27.407)
  Bottom Layer w0.254: TC1.2@195.057,-10.922 211.542,-27.407 v1(244.907,-27.407)
TC4: ADC3.4 TC1.1 | length 118.1
  Top Layer w0.254: TC1.1@191.557,-5.922 191.557,-14.189 192.659,-15.291 199.441,-15.291 206.35,-22.2 206.35,-36.805 204.978,-38.176 204.978,-65.151 205.613,-65.786 230.784,-65.786 240.563,-56.007 240.563,-49.632 241.173,-49.022 ADC3.4@242.222,-49.022
pads on no net: *.1 *.2 *.3 *.4 *.5 *.7 *.8 *.10 *.12 *.16 *.17 *.27 *.28 *.29 *.31 *.35 *.36 *.37 *.38 *.39 *.40

## Polygon pours and split planes (outlines as drawn)
GND on Bottom Layer "GND" (solid, pour order 2): 0,0 304.8,0 304.8,-84.963 0,-84.963
GND on Top Layer "GND" (solid, pour order 0): 0,0 304.546,0 304.546,-84.746 304.8,-85 0,-85

## Silkscreen, mask and mechanical layers (free items; w line width, h text height)
Top Overlay:
  drawing of 20 lines, arcs and shapes, not listed
  text "ARCA 1.0 / Rice Eclipse / 10/3/2020 / ABC & ASC" at 235.077,-82.88 h1.52
Mechanical 4:
  lines w0.254: 0,-84.963 0,0 304.8,0 304.8,-84.963 0,-84.963

## Text inside footprints (layer, text, board x,y; h text height)
*: Top Overlay "39" at 255.549,-57.988 h1.27 r270; Top Overlay "40" at 246.812,-57.506 h1.27 r270; Top Overlay "2" at 247.625,-6.248 h1.27 r270; Top Overlay "1" at 254.991,-6.553 h1.27 r270